# Altium PCB PCB2.PcbDoc (part 1 of 2)
Units mil, origin at the board's own origin, x right, y up, seen from the top; angles counter-clockwise.
Board outline 3622.05 x 2165.35 mil, 4 copper layers (Top Layer, GND, Sign, Bottom Layer), stack 41.556 mil thick; 150 components, 101 nets, 567 pads, 606 vias.
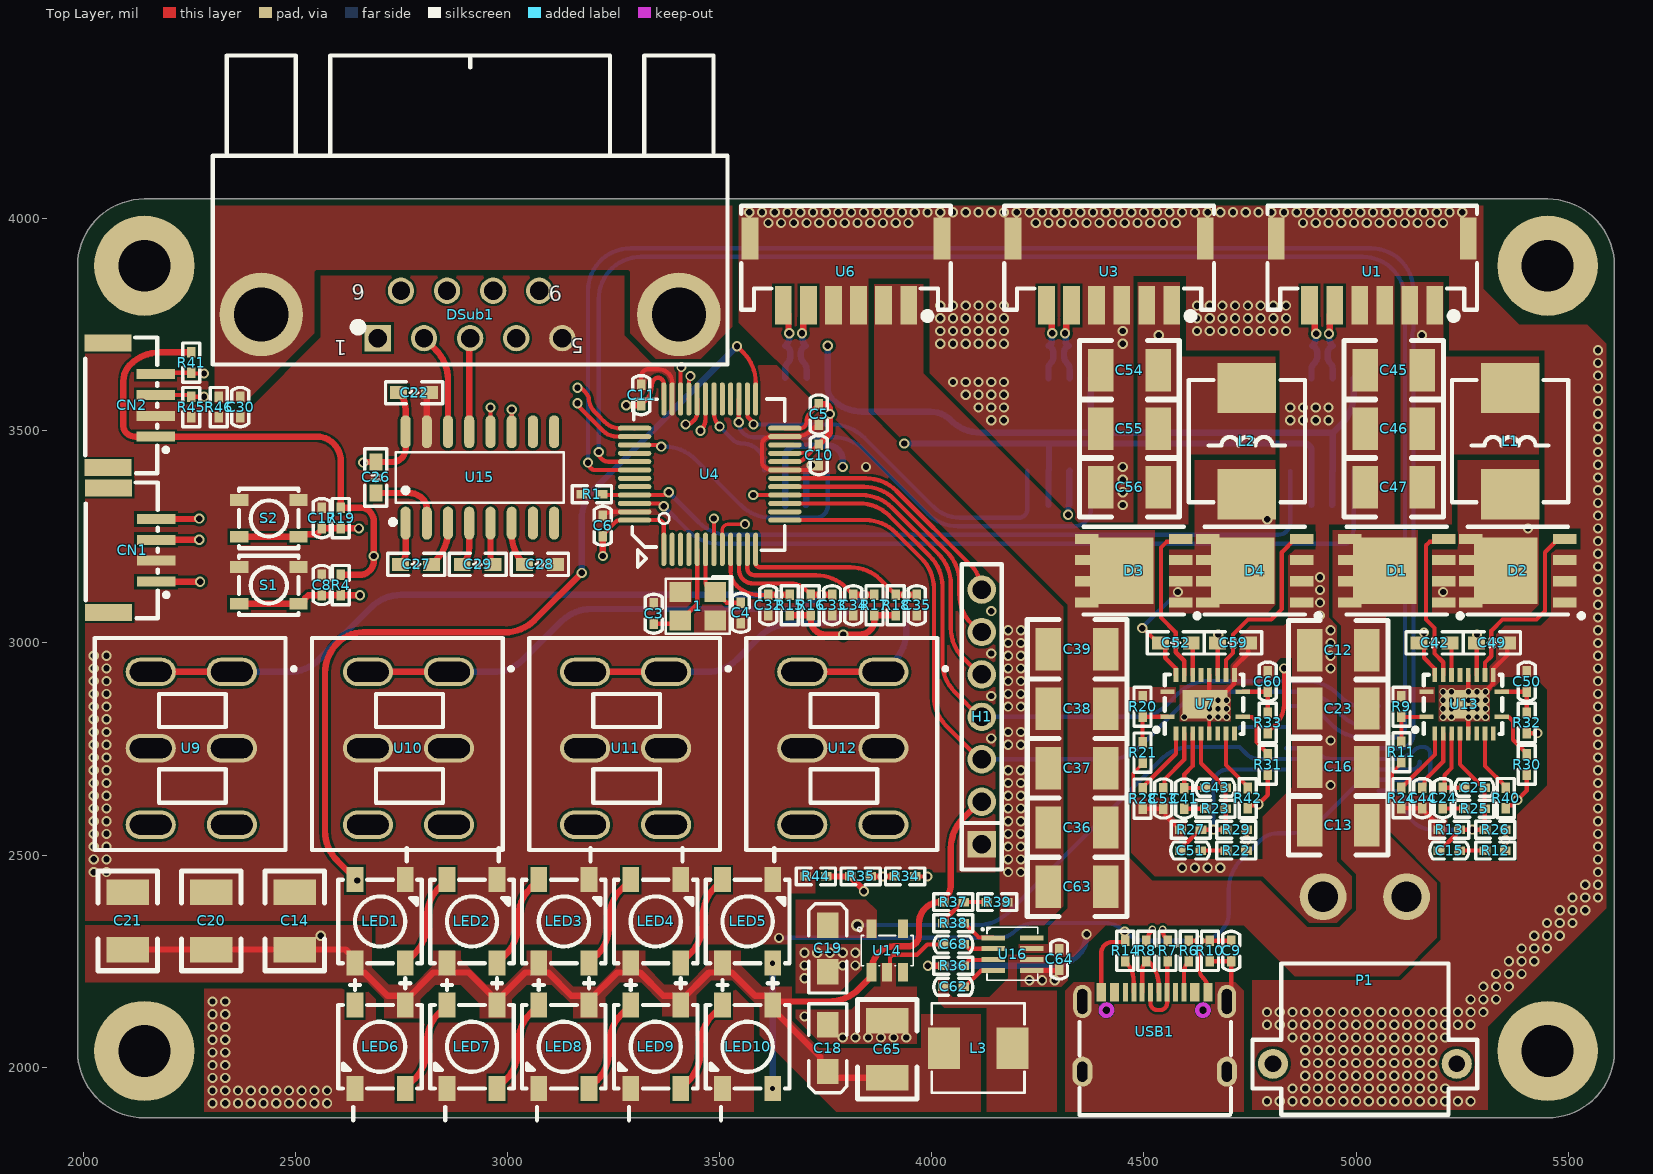
[diagram p0: Top Layer view]
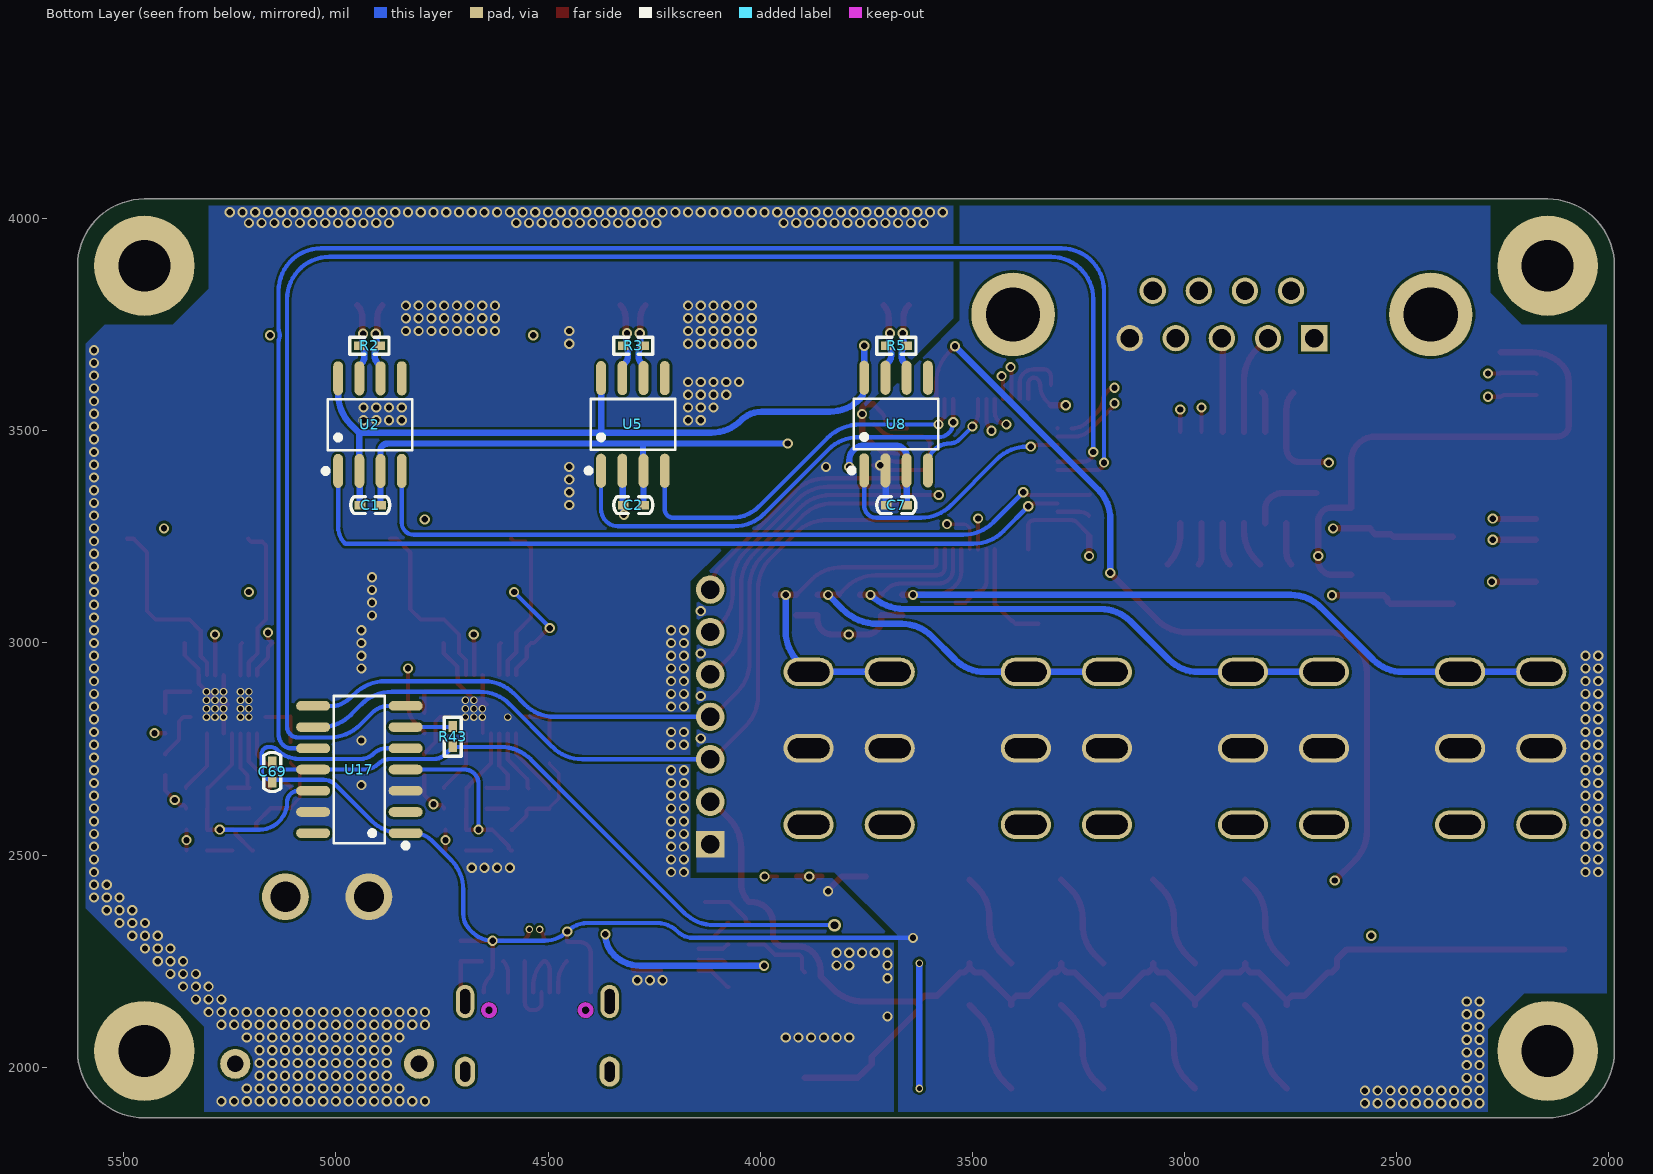
[diagram p1: Bottom Layer view, seen from below]
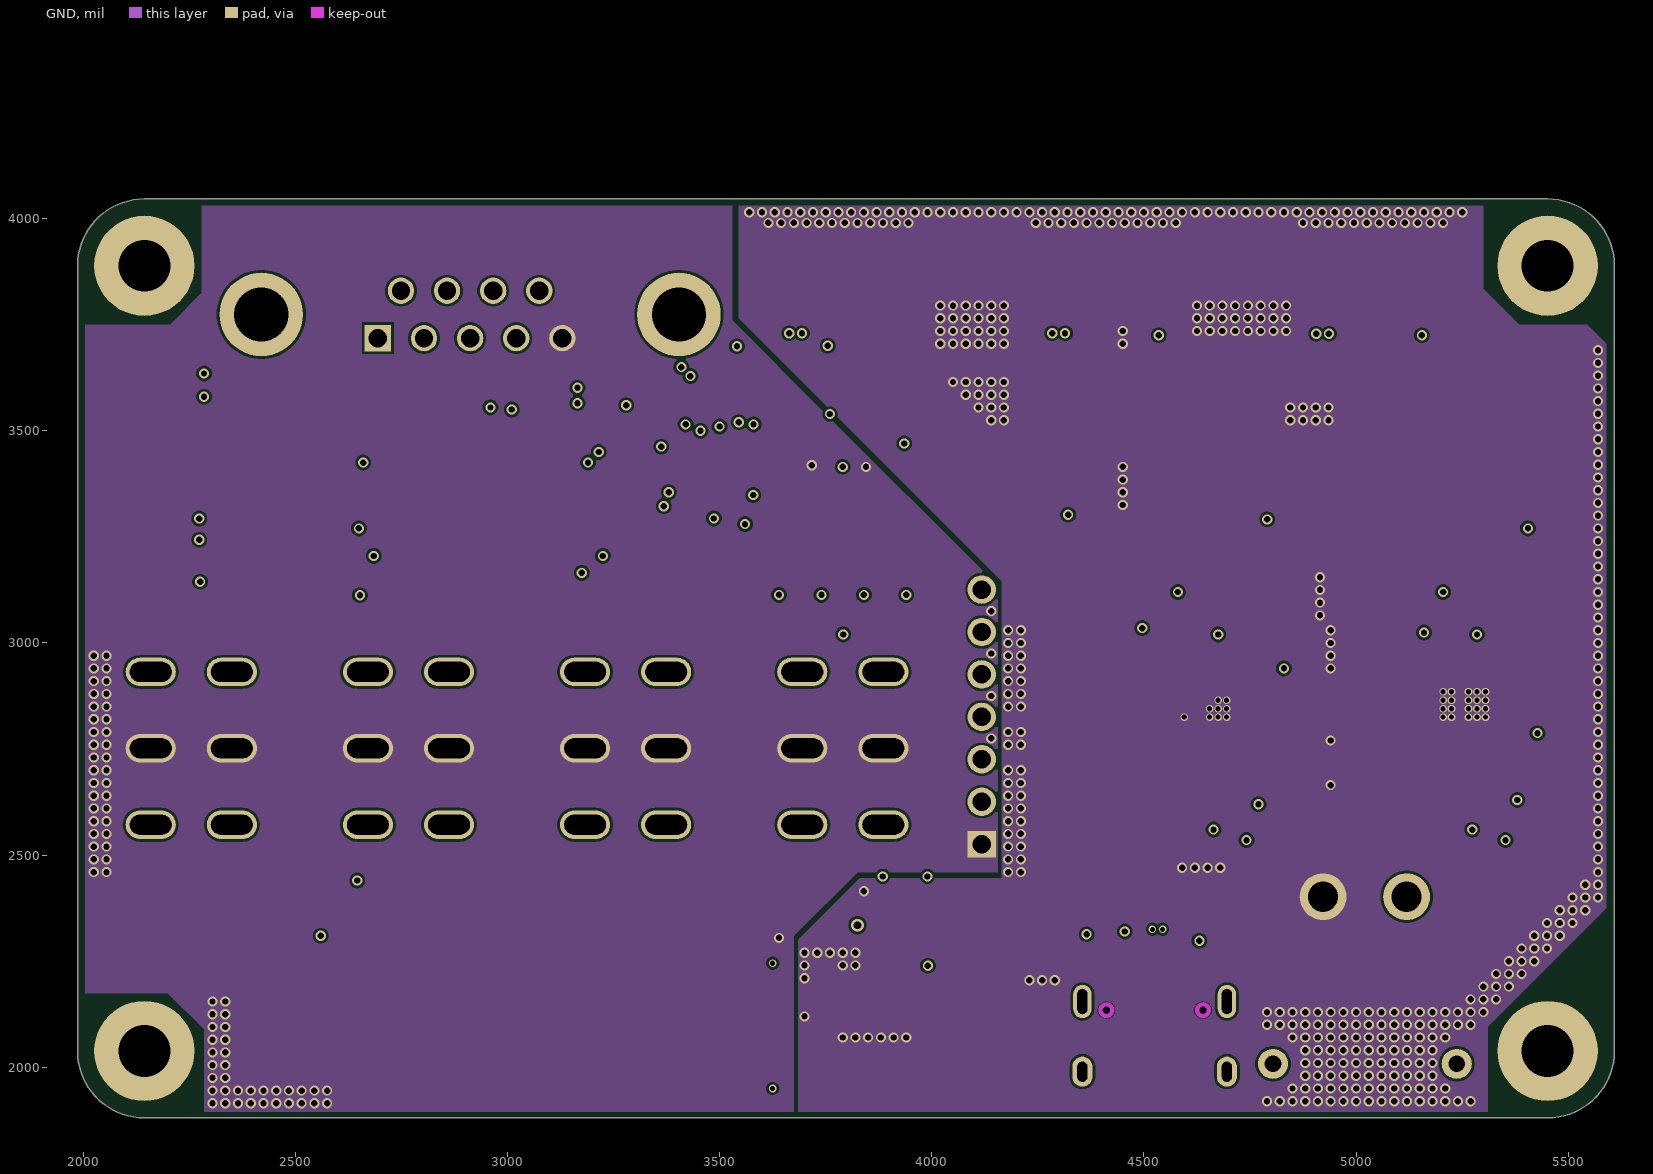
[diagram p2: GND]
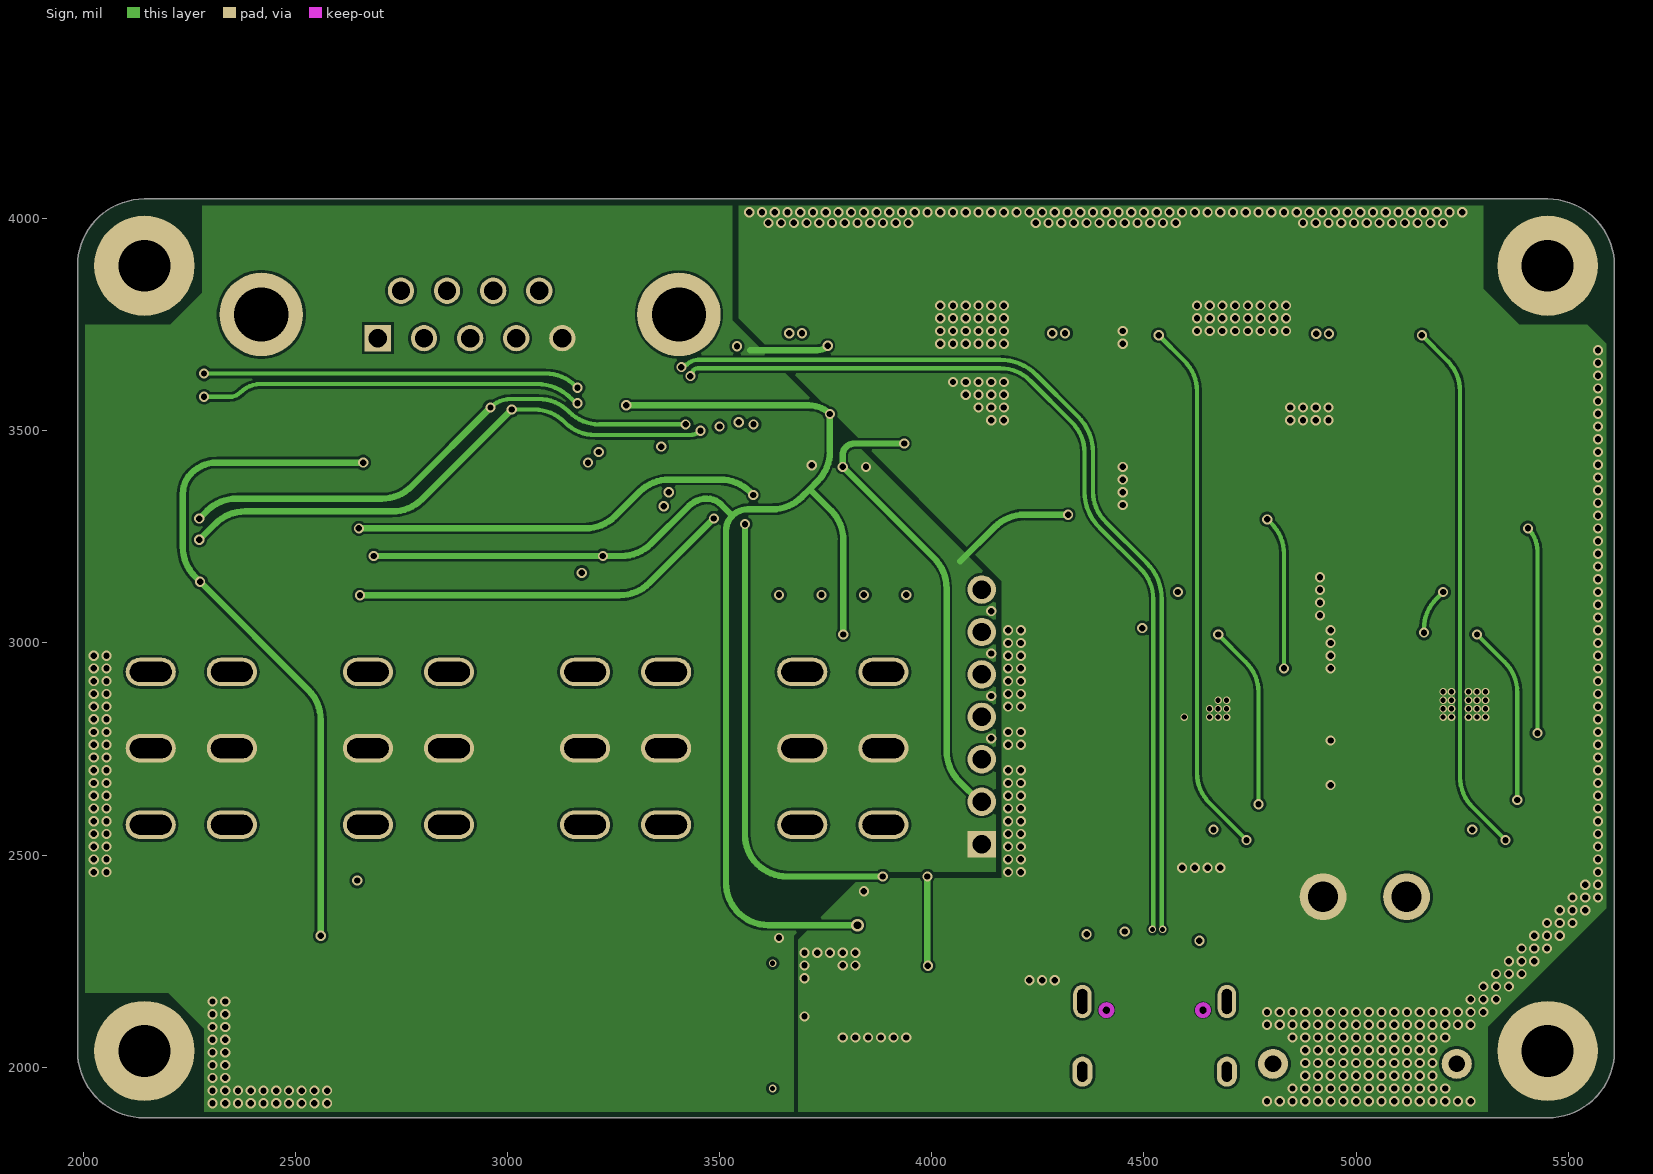
[diagram p3: Sign]
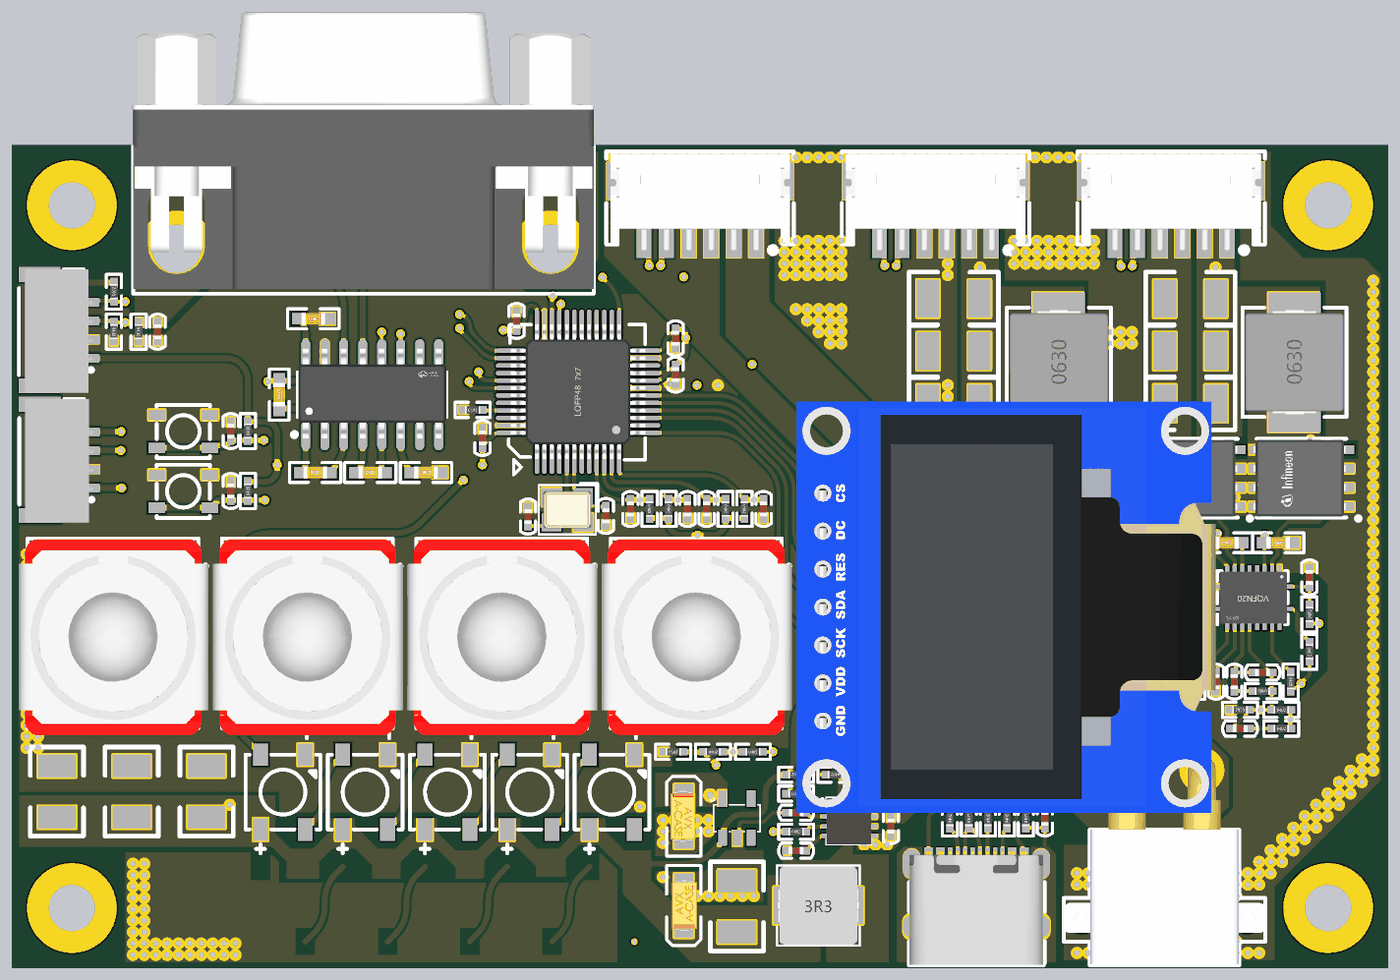
[diagram p5: 3D render of the assembled board from above, using the file's embedded part models]
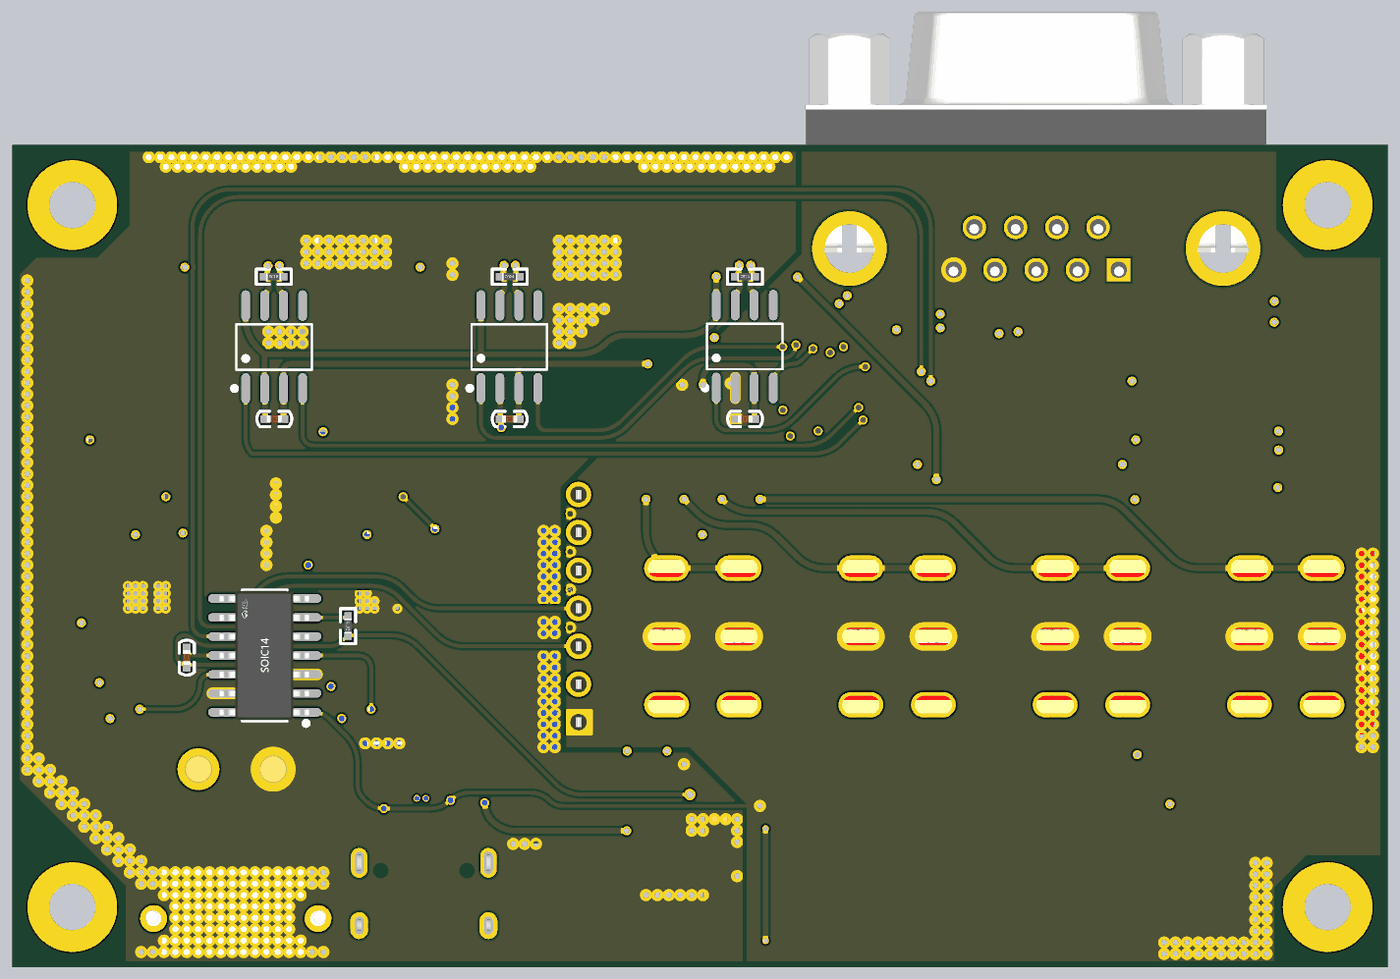
[diagram p6: 3D render of the assembled board from below, using the file's embedded part models]

## Layer stack, top to bottom
Top Solder: solder mask 0.4, Solder Resist, Dk 3.5
Top Layer: signal copper 1.4
Dielectric 2: prepreg 12, PP-006, Dk 4.1
GND: signal copper 1.378
Dielectric 1: dielectric 12, FR-4, Dk 4.8
Sign: signal copper 1.378
Dielectric 3: prepreg 12, PP-006, Dk 4.1
Bottom Layer: signal copper 1.4
Bottom Solder: solder mask 0.4, Solder Resist, Dk 3.5

## Board outline
5451.42,1880.91 2144.33,1880.91 cw(c2144.33,2038.39) 1986.85,2038.39 1986.85,3888.78 cw(c2144.33,3888.78) 2144.33,4046.26 5451.42,4046.26 cw(c5451.42,3888.78) 5608.9,3888.78 5608.9,2038.39 cw(c5451.42,2038.39)

## Design rules (kind name [scope] priority, off if disabled: settings)
AssemblyTestpoint AssemblyTestpoint_1 [All] p2: testpointundercomponent=TRUE minsize=40 maxsize=100 preferedsize=60 minholesize=0 maxholesize=40 preferedholesize=32 testpointgrid=1 usegrid=TRUE gridtolerance=0.01 allowsidetop=TRUE allowsidebottom=TRUE
Clearance [All] p1: gap=6 ignorepadtopadclearanceinfootprint=FALSE
DiffPairsRouting [All] p1: maxlimit=10 minlimit=8 mostfreqgap=10 toplayer_minwidth=10 toplayer_maxwidth=15 toplayer_prefwidth=15 midlayer1_minwidth=10 midlayer1_maxwidth=15 midlayer1_prefwidth=15 midlayer2_minwidth=10 midlayer2_maxwidth=15 midlayer2_prefwidth=15 bottomlayer_minwidth=10 bottomlayer_maxwidth=15 bottomlayer_prefwidth=15 maxuncoupledlength=500
Height [All] p1: minheight=0 maxheight=5000 prefheight=500
HoleSize [All] p1: absolutevalues=TRUE maxlimit=400 minlimit=1 maxpercent=80.000 minpercent=20.000
HoleToHoleClearance [All] p1: gap=5 allowstackedmicrovias=TRUE
MinimumSolderMaskSliver [All] p1: minsoldermaskwidth=0
NetAntennae [InNet('No Net')] p1: netantennaetolerance=0
PlaneConnect [All] p1: planeconnectstyle=Direct reliefexpansion=20 reliefentries=4 reliefconductorwidth=10 reliefairgap=10
PolygonConnect [All] p1: connectstyle=Direct reliefconductorwidth=10 reliefentries=4 polygonreliefangle="90 Angle" airgapwidth=10
RoutingVias [All] p1: holewidth=15 width=24 viastyle="Through Hole" minholewidth=12 minwidth=18 maxholewidth=30 maxwidth=50
SilkToSilkClearance [All] p1: silktosilkclearance=0
SilkToSolderMaskClearance [IsPad] p1: minsilkscreentomaskgap=0 clearancetoexposedcopper=TRUE
SolderMaskExpansion [All] p1: expansion=4 istentingtop=FALSE
UnRoutedNet [All] p1: checkbadconnections=TRUE
Width [All] p1: maxlimit=15 minlimit=8 preferedwidth=10
20 further rules are at their usual default settings.

## Classes and differential pairs
component class Power: C12 C13 C15 C16 C18 C19 C22 C23 C24 C25 C26 C27 C28 C29 C30 C36 C37 C38 C39 C41 C42 C43 C44 C45 C46 C47 C49 C50 C51 C52 C53 C54 C55 C56 C59 C60 C62 C63 C64 C65 C68 C69 D1 D2 D3 D4 DSub1 L1 L2 L3 P1 R9 R11 R12 R13 R20 R21 R22 R23 R24 R25 R26 R27 R28 R29 R30 R31 R32 R33 R36 R37 R38 R39 R40 R42 R43 R44 R46 U7 U13 U14 U15 U16 U17
component class Main: 1 C1 C2 C3 C4 C5 C6 C7 C8 C9 C10 C11 C14 C17 C20 C21 C32 C33 C34 C35 CN1 CN2 H1 LED1 LED2 LED3 LED4 LED5 LED6 LED7 LED8 LED9 LED10 R1 R2 R3 R4 R5 R6 R7 R8 R10 R14 R15 R16 R17 R18 R19 R34 R35 R41 R45 S1 S2 U1 U2 U3 U4 U5 U6 U8 U9 U10 U11 U12 USB1
differential pair USB: +USB_P -USB_N
differential pair FDCAN3: +FDCAN3_P -FDCAN3_N
differential pair FDCAN2: +FDCAN2_P -FDCAN2_N
differential pair FDCAN1: +FDCAN1_P -FDCAN1_N

## Components (designator, comment, footprint, x,y, rotation, side; value= is the part's Value field where it differs from the comment)
1 "3225贴片晶振" OSC-3225-4P 3448.46,3086.85 r180 top value=16M
C1 "100nF" c0402 4895,3325 r0 bottom
C2 "100nF" c0402 4275,3325 r0 bottom
C3 "15pF" c0402 3345,3093.2 r270 top
C4 "15pF" c0402 3550,3046.8 r90 top
C5 "100nF" c0402 3733.46,3514.35 r90 top
C6 "100nF" c0402 3225,3300 r270 top
C7 "100nF" c0402 3655,3325 r0 bottom
C8 "100nF" c0402 2562.56,3160.59 r270 top
C9 "100nF" c0402 4705.63,2250 r90 top
C10 "100nF" c0402 3733.46,3418.65 r90 top
C11 "100nF" c0402 3315,3560 r90 top
C12 "10uF" 1210 4890.39,2983.27 r0 top
C13 "10uF" 1210 4890.39,2569.88 r0 top
C14 "10uF" 1210 2498.66,2412.4 r270 top
C15 "820pF" c0402 5243.71,2510.83 r180 top
C16 "10uF" 1210 4890.39,2707.68 r0 top
C17 "100nF" c0402 2562.56,3318.39 r270 top
C18 "10uF" 3216 3755,1990 r270 top
C19 "10uF" 3216 3755,2335 r90 top
C20 "10uF" 1210 2301.81,2412.4 r270 top
C21 "10uF" 1210 2104.96,2412.4 r270 top
C22 "1uF" "C 0603_M" 2780,3590 r180 top
C23 "10uF" 1210 4890.39,2845.47 r0 top
C24 "5.6nF" c0402 5204.34,2658.46 r270 top
C25 "82pF" c0402 5302.77,2658.46 r180 top
C26 "1uF" "C 0603_M" 2690,3390 r90 top
C27 "1uF" "C 0603_M" 2785,3185 r0 top
C28 "1uF" "C 0603_M" 3076.5,3185 r0 top
C29 "1uF" "C 0603_M" 2930,3185 r0 top
C30 "100nF" c0402 2370,3580 r270 top
C32 "100nF" c0402 3615,3065 r90 top
C33 "100nF" c0402 3765,3065 r90 top
C34 "100nF" c0402 3815,3065 r90 top
C35 "100nF" c0402 3965,3065 r90 top
C36 "10uF" 1210 4275,2565 r0 top
C37 "10uF" 1210 4275,2705 r0 top
C38 "10uF" 1210 4275,2845 r0 top
C39 "10uF" 1210 4275,2985 r0 top
C41 "5.6nF" c0402 4595.12,2657.45 r270 top
C42 "100nF" "C 0603_M" 5185,3000 r0 top
C43 "82pF" c0402 4692.53,2658.46 r180 top
C44 "47nF" c0402 5156.14,2658.46 r270 top
C45 "22uF" 1210 5021.14,3642.72 r0 top
C46 "22uF" 1210 5021.14,3504.92 r0 top
C47 "22uF" 1210 5021.14,3367.13 r0 top
C49 "2.2uF" "C 0603_M" 5320,3000 r180 top
C50 "12pF" c0402 5402.2,2933.04 r270 top
C51 "820pF" c0402 4633.48,2510.83 r180 top
C52 "100nF" "C 0603_M" 4575,3000 r0 top
C53 "47nF" c0402 4545.91,2657.45 r270 top
C54 "22uF" 1210 4398.27,3642.72 r0 top
C55 "22uF" 1210 4398.27,3504.92 r0 top
C56 "22uF" 1210 4398.27,3367.13 r0 top
C59 "2.2uF" "C 0603_M" 4710,3000 r180 top
C60 "12pF" c0402 4791.97,2933.04 r270 top
C62 "100nF" c0402 4075,2189.37 r180 top
C63 "10uF" 1210 4275,2425 r0 top
C64 "100nF" c0402 4300,2230 r90 top
C65 "10uF" 1210 3895,2110 r270 top
C68 "100nF" c0402 4026.8,2289.37 r0 top
C69 "100nF" c0402 5150,2671.8 r90 bottom
CN1 "卧式UART" CONN-SMD_4P-P1.25_GH1.25-4P 2116.1,3218.35 r270 top
CN2 "卧式STLINK" CONN-SMD_4P-P1.25_GH1.25-4P 2115,3560 r270 top
D1 "CSD18540" pg-tdson-8 4986.62,3120.28 r90 top
D2 "CSD18540" pg-tdson-8 5272.05,3120.28 r90 top
D3 "CSD18540" pg-tdson-8 4366.54,3120.28 r90 top
D4 "CSD18540" pg-tdson-8 4651.97,3120.28 r90 top
DSub1 "DMR-9S" DSUB-TH_DMR-9S 2912.01,4022.68 r90 top
H1 "PM254V-11-07-H85" HDR-TH_7P-P2.54-V-F 4117.83,2825.79 r90 top
L1 "5.6uH" L-SMD-0630 5362.83,3475.39 r90 top
L2 "5.6uH" L-SMD-0630 4742.76,3475.39 r90 top
L3 "22uH" IND-SMD_L5.4-W5.2 4109.29,2045 r0 top value=10uH
LED1 "XL-5050RGBC-WS2812B" LED-SMD_4P-L5.0-W5.0-BL_XL-5050RGBC 1980.55,2927.24 r0 top
LED2 "XL-5050RGBC-WS2812B" LED-SMD_4P-L5.0-W5.0-BL_XL-5050RGBC 2197.09,2927.24 r0 top
LED3 "XL-5050RGBC-WS2812B" LED-SMD_4P-L5.0-W5.0-BL_XL-5050RGBC 2413.62,2927.24 r0 top
LED4 "XL-5050RGBC-WS2812B" LED-SMD_4P-L5.0-W5.0-BL_XL-5050RGBC 2630.15,2927.24 r0 top
LED5 "XL-5050RGBC-WS2812B" LED-SMD_4P-L5.0-W5.0-BL_XL-5050RGBC 2846.7,2927.24 r0 top
LED6 "XL-5050RGBC-WS2812B" LED-SMD_4P-L5.0-W5.0-BL_XL-5050RGBC 3419.22,1464.8 r180 top
LED7 "XL-5050RGBC-WS2812B" LED-SMD_4P-L5.0-W5.0-BL_XL-5050RGBC 3635.75,1464.8 r180 top
LED8 "XL-5050RGBC-WS2812B" LED-SMD_4P-L5.0-W5.0-BL_XL-5050RGBC 3852.28,1464.8 r180 top
LED9 "XL-5050RGBC-WS2812B" LED-SMD_4P-L5.0-W5.0-BL_XL-5050RGBC 4068.82,1464.8 r180 top
LED10 "XL-5050RGBC-WS2812B" LED-SMD_4P-L5.0-W5.0-BL_XL-5050RGBC 4285.36,1464.8 r180 top
P1 "XT30PW-M" XT30PW-M 5020.63,2205 r0 top
R1 "10KΩ" R0402 3175,3350 r0 top
R2 "120Ω" R0402 4896.8,3700 r0 bottom
R3 "120Ω" R0402 4275,3700 r0 bottom
R4 "10KΩ" R0402 2607.56,3112.39 r90 top
R5 "120Ω" R0402 3655,3700 r0 bottom
R6 "5.1KΩ" R0402 4605.63,2250 r90 top
R7 "22Ω" R0402 4555.63,2250 r90 top
R8 "22Ω" R0402 4505.63,2250 r90 top
R9 "80.6KΩ" R0402 5106.93,2873.99 r270 top
R10 "10KΩ" R0402 4655.63,2250 r90 top
R11 "7.5KΩ" R0402 5106.93,2718.53 r90 top
R12 "100Ω" R0402 5303.78,2510.83 r0 top
R13 "0Ω" R0402 5243.71,2560.04 r180 top
R14 "5.1KΩ" R0402 4455.63,2250 r90 top
R15 "10KΩ" R0402 3665,3113.2 r270 top
R16 "10KΩ" R0402 3715,3113.2 r270 top
R17 "10KΩ" R0402 3865,3113.2 r270 top
R18 "10KΩ" R0402 3915,3113.2 r270 top
R19 "10KΩ" R0402 2607.56,3270.19 r90 top
R20 "80.6KΩ" R0402 4496.69,2873.99 r270 top
R21 "7.5KΩ" R0402 4496.69,2717.52 r90 top
R22 "100Ω" R0402 4693.54,2510.83 r0 top
R23 "10KΩ" R0402 4692.53,2609.25 r180 top
R24 "23.7KΩ" R0402 5106.93,2658.46 r270 top
R25 "10KΩ" R0402 5302.77,2609.25 r180 top
R26 "10KΩ" R0402 5303.78,2560.04 r0 top
R27 "0Ω" R0402 4634.49,2560.04 r180 top
R28 "23.7KΩ" R0402 4496.69,2657.45 r270 top
R29 "10KΩ" R0402 4693.54,2560.04 r0 top
R30 "20KΩ" R0402 5402.2,2737.2 r270 top
R31 "20KΩ" R0402 4791.97,2737.2 r270 top
R32 "499Ω" R0402 5402.2,2787.43 r90 top
R33 "499Ω" R0402 4791.97,2787.43 r90 top
R34 "10KΩ" R0402 3913.02,2449.68 r0 top
R35 "1KΩ" R0402 3808.02,2449.68 r0 top
R36 "10KΩ" R0402 4026.8,2239.37 r0 top
R37 "43KΩ" R0402 4075,2389.37 r180 top
R38 "51KΩ" R0402 4075,2339.37 r180 top
R39 "8.2KΩ" R0402 4178.2,2389.37 r180 top
R40 "20KΩ" R0402 5352.99,2658.46 r270 top
R41 "10KΩ" R0402 2255,3636.8 r90 top
R42 "20KΩ" R0402 4745,2658.2 r270 top
R43 "10KΩ" R0402 4725,2803.2 r270 bottom
R44 "0Ω" R0402 3703.02,2449.68 r0 top
R45 "10KΩ" R0402 2255,3580 r270 top
R46 "10KΩ" R0402 2320,3580 r270 top
S1 "SW" KEY_SMD 2437.56,3135.59 r180 top
S2 "SW" KEY_SMD 2437.56,3293.39 r180 top
U1 "ZX-ZH1.5-6PWT" CONN-SMD_6P-P1.50_ZX-ZH1.5-6PWT 5038.04,3874.25 r180 top
U2 "SN65HVD1050DR" SOIC-8_L4.9-W3.9-P1.27-LS6.0-BL 4919.76,3514.45 r180 bottom
U3 "ZX-ZH1.5-6PWT" CONN-SMD_6P-P1.50_ZX-ZH1.5-6PWT 4417.95,3874.25 r180 top
U4 "STM32G474CET6" LQFP-48 2011.77,2292.72 r90 top
U5 "SN65HVD1050DR" SOIC-8_L4.9-W3.9-P1.27-LS6.0-BL 4300,3515 r180 bottom
U6 "ZX-ZH1.5-6PWT" CONN-SMD_6P-P1.50_ZX-ZH1.5-6PWT 3797.87,3874.25 r180 top
U7 "LM25145RGYR" VQFN-20_L4.5-W3.5-P0.50-BL-EP 4644.33,2855.4 r0 top
U8 "SN65HVD1050DR" SOIC-8_L4.9-W3.9-P1.27-LS6.0-BL 3680,3515.85 r180 bottom
U9 "7208P1YZQI" SW-TH_6P-L12.7-W11.4-P4.70-LS4.8 2262.44,2761.73 r180 top
U10 "7208P1YZQI" SW-TH_6P-L12.7-W11.4-P4.70-LS4.8 2774.25,2761.73 r180 top
U11 "7208P1YZQI" SW-TH_6P-L12.7-W11.4-P4.70-LS4.8 3286.06,2761.73 r180 top
U12 "7208P1YZQI" SW-TH_6P-L12.7-W11.4-P4.70-LS4.8 3797.87,2761.73 r180 top
U13 "LM25145RGYR" VQFN-20_L4.5-W3.5-P0.50-BL-EP 5254.57,2855.31 r0 top
U14 "XC6201P332MR-HXY" SOT-23-5_L3.0-W1.7-P0.95-LS2.8-BR 3895,2275 r270 top
U15 "MAX232ESE+T" SOIC-16_L9.9-W3.9-P1.27-LS6.0-BL 2930,3390 r0 top
U16 "MP9943" "QFN-8 3x3" 4145,2304.96 r0 top
U17 "AD8402ARZ10-REEL" SOIC-14_L8.7-W3.9-P1.27-LS6.0-BL 4944.66,2701.67 r90 bottom
USB1 "TYPE-C 16PIN 2MD(073)" USB-C-SMD_TYPE-C-6PIN-2MD-073 4525.35,2083.15 r0 top

## Footprints (in the part's own frame and the unit in brackets; to place one, negate y for a bottom-side part, rotate by r counter-clockwise, add the part's x,y. Pads: shape width x height; smd on the part's side, far side on the other; paste and mask are expansions set on the pad)
1210 [mil]
  rect 60x100 smd: 1(0,0) 2(135,0)
  silkscreen extent -50,-70 185,70, body extent 4,-49 130,49, height 30
3216 [mil]
  rect 60x50 smd: 1(0,0) 2(-110,0)
  silkscreen extent -160,-45 50,45, body extent -122,-31 12,35, height 67
c0402 [mil]
  rect 25x20 smd: 1(0,0) 2(48.2,0)
  silkscreen extent -22,-20 70,20, body extent 5,-10 44,10, height 20
"C 0603_M" [mil] "无极性贴片电容"
  rect 40x30 smd: 1(-36.5,0) 2(36.5,0)
  silkscreen extent -68,-26 68,26, body extent -31,-16 31,16, height 32
CONN-SMD_4P-P1.25_GH1.25-4P [mm]
  rect 0.6x2.3 smd mask+0.051: 1(1.875,1.425) 2(0.625,1.425) 3(-0.625,1.425) 4(-1.875,1.425)
  rect 1x2.8 smd mask+0.051: 5(-3.725,-1.425) 6(3.725,-1.425)
  silkscreen extent -4.06,-2.8 4.06,2.16, body extent -4.07,-2.4 4.19,2.15, height 4.13
CONN-SMD_6P-P1.50_ZX-ZH1.5-6PWT [mm]
  rect 1x2.3 smd paste+0 mask+0.05: 1(-3.75,2) 2(-2.25,2) 3(-0.75,2) 4(0.75,2) 5(2.25,2) 6(3.75,2)
  rect 1x2.5 smd paste+0 mask+0.05: 7(5.75,-2) 8(-5.75,-2)
  silkscreen extent -6.27,-3.97 6.27,3.04, body extent -6,-3.81 6.01,2.69, height 3.7
DSUB-TH_DMR-9S [mil]
  rect 62x62 hole 43.31 paste+0 mask+2: 1(-304.49,217.32)
  round 62 hole 43.31 paste+0 mask+2: 2(-304.49,108.66) 3(-304.49,0) 4(-304.49,-108.66) 5(-304.49,-217.32) 6(-192.68,162.99) 7(-192.68,54.33) 8(-192.68,-54.33) 9(-192.68,-162.99)
  round 196.85 hole 127.95 paste+0 mask+2: 10(-248.59,492.13) 11(-248.59,-492.12)
  silkscreen extent -367,-606 362,606, body extent -355,-608 374,608, height 498
HDR-TH_7P-P2.54-V-F [mm]
  rect 1.575x1.7 hole 1.1: 1(-7.62,0)
  round 1.7 hole 1.1: 2(-5.08,0) 3(-2.54,0) 4(0,0) 5(2.54,0) 6(5.08,0) 7(7.62,0)
  silkscreen extent -9.13,-1.2 9.13,1.2, body extent -13.63,-26.36 13.88,1.69, height 14.46
IND-SMD_L5.4-W5.2 [mm]
  rect 1.9x2.5 smd: 1(2.05,0) 2(-2.05,0)
  silkscreen extent -2.78,-2.68 2.78,2.68, body extent -2.7,-2.6 2.7,2.6, height 3.1
KEY_SMD [mm]
  rect 1.1x0.7 smd: 1(-1.775,-1.1) 1(1.775,-1.1) 2(-1.775,1.1) 2(1.775,1.1)
  silkscreen extent -1.78,-1.78 1.78,1.78, body extent -1.75,-1.35 1.75,1.35, height 1.6
L-SMD-0630 [mm] "一体化成型电感"
  rect 3x3.5 smd: 1(-3.175,0) 2(3.175,0)
  silkscreen extent -3.66,-3.48 3.66,3.48, body extent -3.47,-3.3 3.47,3.3, height 3.05
LED-SMD_4P-L5.0-W5.0-BL_XL-5050RGBC [mm]
  rect 1x1.5 smd: 1(16.771,-17.323) 2(19.771,-17.323) 3(19.771,-12.323) 4(16.771,-12.323)
  silkscreen extent 15.77,-18.92 20.77,-10.42, body extent 15.79,-17.56 20.79,-12.16, height 1.54
LQFP-48 [mm]
  oval 2x0.3 smd: 1(23.567,-34.461) 2(23.567,-34.961) 3(23.567,-35.461) 4(23.567,-35.961) 5(23.567,-36.461) 6(23.567,-36.961) 7(23.567,-37.461) 8(23.567,-37.961) 9(23.567,-38.461) 10(23.567,-38.961) 11(23.567,-39.461) 12(23.567,-39.961) 25(32.567,-39.961) 26(32.567,-39.461) 27(32.567,-38.961) 28(32.567,-38.461) 29(32.567,-37.961) 30(32.567,-37.461) 31(32.567,-36.961) 32(32.567,-36.461) 33(32.567,-35.961) 34(32.567,-35.461) 35(32.567,-34.961) 36(32.567,-34.461)
  oval 0.3x2 smd: 13(25.317,-41.711) 14(25.817,-41.711) 15(26.317,-41.711) 16(26.817,-41.711) 17(27.317,-41.711) 18(27.817,-41.711) 19(28.317,-41.711) 20(28.817,-41.711) 21(29.317,-41.711) 22(29.817,-41.711) 23(30.317,-41.711) 24(30.817,-41.711) 37(30.817,-32.711) 38(30.317,-32.711) 39(29.817,-32.711) 40(29.317,-32.711) 41(28.817,-32.711) 42(28.317,-32.711) 43(27.817,-32.711) 44(27.317,-32.711) 45(26.817,-32.711) 46(26.317,-32.711) 47(25.817,-32.711) 48(25.317,-32.711)
  silkscreen extent 22.51,-41.71 32.57,-32.57, body extent 23.56,-41.71 32.57,-32.71, height 1.45
OSC-3225-4P [mm] "3.2*2.5*0.7mm(长宽高)                             淘宝ID:黄晶宝石"
  rect 1.3x1.2 smd: 1(-1.05,-0.85) 2(1.05,-0.85) 3(1.05,0.85) 4(-1.05,0.85)
  silkscreen extent -2.03,-1.75 1.91,1.65, body extent -1.6,-1.25 1.6,1.25, height 0.7
pg-tdson-8 [mm]
  rect 0.61x1.4 smd: 1(3.175,-5.588) 2(-0.635,0.044) 2(0.635,0.044) 2(1.905,0.044) 2(3.175,0.044) 3(-0.635,-5.588) 3(0.635,-5.588) 3(1.905,-5.588)
  rect 4x3.81 smd: 2(1.27,-2.056)
  silkscreen extent -1.55,-6.7 3.9,0.23, body extent -1.43,-5.73 3.96,0.42, height 1.01
"QFN-8 3x3" [mm]
  rect 1.4x0.3 smd: 1(0,0) 2(0,-0.65) 3(0,-1.3) 4(0,-1.95) 5(2.3,-1.95) 6(2.3,-1.3) 7(2.3,-0.65) 8(2.3,0)
  silkscreen extent -0.64,-2.54 2.67,0.64, body extent -0.41,-2.53 2.69,0.57, height 0.94
R0402 [mil] "1/16W"
  rect 25x20 smd: 1(0,0) 2(48.2,0)
  silkscreen extent -22,-20 70,20, body extent 5,-10 44,10, height 14
SOIC-8_L4.9-W3.9-P1.27-LS6.0-BL [mm]
  oval 0.588x2.045 smd mask+0.051: 1(-1.905,-2.772) 2(-0.635,-2.772) 3(0.635,-2.772) 4(1.905,-2.772) 5(1.905,2.772) 6(0.635,2.772) 7(-0.635,2.772) 8(-1.905,2.772)
  silkscreen extent -2.8,-2.92 2.53,1.52, body extent -2.45,-3 2.45,3, height 1.75
SOIC-14_L8.7-W3.9-P1.27-LS6.0-BL [mil]
  oval 22.6x80.24 smd: 1(-150,-109.02) 2(-100,-109.02) 3(-50,-109.02) 4(0,-109.02) 5(50,-109.02) 6(100,-109.02) 7(150,-109.02) 8(150,109.02) 9(100,109.02) 10(50,109.02) 11(0,109.02) 12(-50,109.02) 13(-100,109.02) 14(-150,109.02)
  silkscreen extent -185,-115 173,60, body extent -169,-117 169,119, height 75
SOIC-16_L9.9-W3.9-P1.27-LS6.0-BL [mil]
  oval 23.7x77.6 smd paste+0 mask+2: 1(-169.99,-107.7) 2(-119.99,-107.7) 3(-69.99,-107.7) 4(-19.99,-107.7) 5(30.01,-107.7) 6(80.01,-107.7) 7(130.01,-107.7) 8(180.01,-107.7) 9(180.01,107.7) 10(130.01,107.7) 11(80.01,107.7) 12(30.01,107.7) 13(-19.99,107.7) 14(-69.99,107.7) 15(-119.99,107.7) 16(-169.99,107.7)
  silkscreen extent -206,-111 203,60, body extent -190,-115 200,121, height 75
SOT-23-5_L3.0-W1.7-P0.95-LS2.8-BR [mm]
  rect 1.1x0.6 smd: 1(1.3,-0.95) 2(1.3,0) 3(1.3,0.95) 4(-1.3,0.95) 5(-1.3,-0.95)
  silkscreen extent -1.4,-1.78 0.9,1.55, body extent -1.5,-1.5 1.5,1.5, height 1.3
SW-TH_6P-L12.7-W11.4-P4.70-LS4.8 [mm]
  oval 3x1.7 hole 1.2 slot 2.5 at 0 deg: 1(-2.235,-4.318) 2(-2.235,0.255) 3(-2.235,4.827) 4(2.616,-4.318) 5(2.618,0.255) 6(2.618,4.827)
  silkscreen extent -6.05,-6.35 5.96,6.35, body extent -6.15,-6.3 6.56,6.8, height 41.07
USB-C-SMD_TYPE-C-6PIN-2MD-073 [mm]
  rect 0.55x1.1 smd paste-100 mask+0.05: 1(-3.2,2.375) 2(-2.4,2.375) 11(2.4,2.375) 12(3.2,2.375)
  rect 0.3x1.1 smd paste-100 mask+0.05: 3(-1.75,2.375) 4(-1.25,2.375) 5(-0.75,2.375) 6(-0.25,2.375) 7(0.25,2.375) 8(0.75,2.375) 9(1.25,2.375) 10(1.75,2.375)
  oval 1.2x1.8 hole 0.6 slot 1.2 at 90 deg paste+0 mask+0.05: 13(-4.325,-2.375) 14(4.325,-2.375)
  oval 1.1x2 hole 0.6 slot 1.5 at 90 deg paste+0 mask+0.05: 13(-4.325,1.825) 14(4.325,1.825)
  Keep-Out Layer board cut-out: -2.54,1.305 -2.589,1.477 -2.717,1.603 -2.89,1.649 -3.063,1.603 -3.191,1.477 -3.24,1.305 -3.24,1.305 -3.191,1.133 -3.063,1.007 -2.89,0.961 -2.717,1.007 -2.589,1.133 -2.54,1.305
  Keep-Out Layer board cut-out: 3.24,1.305 3.191,1.477 3.063,1.603 2.89,1.649 2.717,1.603 2.589,1.477 2.54,1.305 2.54,1.305 2.589,1.133 2.717,1.007 2.89,0.961 3.063,1.007 3.191,1.133 3.24,1.305
  Keep-Out Layer circle w0.025: c-2.89,1.305 r0.35
  Keep-Out Layer circle w0.254: c-2.89,1.305 r0.35
  Keep-Out Layer circle w0.025: c2.89,1.305 r0.35
  Keep-Out Layer circle w0.254: c2.89,1.305 r0.35
  silkscreen extent -4.5,-4.97 4.57,0.6, body extent -4.47,-4.93 4.47,2.65, height 3.36
VQFN-20_L4.5-W3.5-P0.50-BL-EP [mm]
  rect 0.85x0.28 smd: 1(-2.25,-0.752) 10(2.25,-0.752) 11(2.25,0.748) 20(-2.25,0.75)
  rect 0.28x0.85 smd: 2(-1.749,-1.75) 3(-1.248,-1.75) 4(-0.749,-1.75) 5(-0.248,-1.75) 6(0.251,-1.75) 7(0.752,-1.75) 8(1.251,-1.75) 9(1.752,-1.75) 12(1.752,1.75) 13(1.251,1.75) 14(0.75,1.748) 15(0.25,1.748) 16(-0.25,1.748) 17(-0.75,1.748) 18(-1.25,1.748) 19(-1.75,1.748)
  rect 2.7x1.7 smd: 21(0,-0.002)
  silkscreen extent -3.05,-1.78 2.29,1.78, body extent -2.26,-1.76 2.26,1.76, height 1
XT30PW-M [mm]
  round 1.8 hole 1: 0(-5.5,-5) 0(5.5,-5)
  round 2.8 hole 1.8: +(2.5,5) -(-2.5,5)
  silkscreen extent -6.73,-8.05 6.73,1, body extent -6.65,-8 6.65,5.95, height 5.29

## Part data
C1 C2 C3 C4 C5 C6 C7 C8 C9 C10 C11 C15 C17 C24 C25 C30 C32 C33 C34 C35 C41 C42 C43 C44 C50 C51 C52 C53 C60 C62 C64 C68 C69: library part 0402贴片电容, "贴片电容0402"
C12 C13 C14 C16 C20 C21 C23 C36 C37 C38 C39 C45 C46 C47 C54 C55 C56 C63 C65: library part 1210贴片电容, "1210贴片电容"
C18 C19: library part 3216钽电容, "3216钽电容"
C22 C26 C27 C28 C29 C49 C59: library part 0603贴片电容, "0603贴片电容"
D1 D2 D3 D4: "N沟道MOS管", ComponentLink1Description="Manufacturer Link", ComponentLink1URL=http://www.irf.com/, DatasheetVersion=PD-9.814, LatestRevisionDate=17-Jul-2002, LatestRevisionNote="Re-released for DXP Platform.", Note="Pin 2 is electrically connected to pin 4.", PackageDescription="TO, Thru-Hole, Vertical, Heatsink Mounted; 3 In-Line Leads; Pitch 2.54 mm", PackageReference=TO-220AB, PackageVersion=Feb-1997, Published=8-Jun-2000, Publisher="Altium Limited"
H1: Current Rating (Max)=3A, JLCPCB Part Class="Extended Part", LCSC Part Name="间距:2.54mm 1x7P 直插", Manufacturer=XFCN(兴飞), Operating Temperature Range=-40℃~+105℃, Voltage Rating (Max)=250V, Add into BOM=yes, Circular Hole / Square Hole=方孔, Convert to PCB=yes, Datasheet=https://atta.szlcsc.com/upload/public/pdf/source/20210514/C2832270_F424CC0071A81298BFB56B53406F9842.pdf, Device=PM254V-11-07-H85, Holes Direction=顶部, Holes Structure=1x7P, Insulation Height=-, Manufacturer Part=PM254V-11-07-H85, Mounting Type=直插, Number of Holes=7P, Number of Rows=单排, Pitch=2.54mm, Row Spacing=-, Supplier=LCSC, Supplier Footprint=插件,P=2.54mm, Supplier Part=C2832270, Symbol=PM254V-11-07-H85
L1 L2: library part 0630功率电感, "一体成型屏蔽电感"
L3: library part 0530屏蔽电感, "一体成型屏蔽电感，0530封装，额定电流3A", DC Resistance (DCR)=125mΩ, JLCPCB Part Class="Extended Part", LCSC Part Name="10uH ±20% 3.5A", Manufacturer=XR(祥如), Manufacturer Part=XR0530-100M, Rated Current=3.2A, Saturation Current (Isat)=3.5A, Tolerance=±20%, Add into BOM=yes, Convert to PCB=yes, Datasheet=https://atta.szlcsc.com/upload/public/pdf/source/20240328/42FE63A3232C4AF7EB8F1CDEDD5FC69F.pdf, Device=XR0530-100M, Supplier=LCSC, Supplier Footprint=SMD,0530, Supplier Part=C5307602, Symbol=XR0530-100M, Type=一体成型电感
LED1 LED2 LED3 LED4 LED5 LED6 LED7 LED8 LED9 LED10: library part WS2812B彩灯珠, "WS2812B彩灯珠", Color Temperature=-, Emitted Color=RGB三色, JLCPCB Part Class="Extended Part", Lens Color=无色透明透镜, Manufacturer=XINGLIGHT(成兴光), Operating Temperature=-20℃~+85℃, Add into BOM=yes, Convert to PCB=yes, Datasheet=https://atta.szlcsc.com/upload/public/pdf/source/20230111/86AAD2096485A2E5BCAB883FF8CBE6FD.pdf, Device=XL-5050RGBC-WS2812B, Diode Configuration=-, Dominant Wavelength=-, Forward Current=-, LCSC Part Name=XL-5050RGBC-WS2812B, Manufacturer Part=XL-5050RGBC-WS2812B, Mounting Sytle=正贴, Peak Wavelength=625nm；470nm；530nm, Power Dissipation=-, Supplier=LCSC, Supplier Footprint=SMD5050, Supplier Part=C2843785, Symbol=XL-5050RGBC-WS2812B, Viewing Angle=120°
P1: library part 卧式XT30母头, "卧式XT30母头", LatestRevisionDate=17-Jul-2002, LatestRevisionNote="Re-released for DXP Platform.", Publisher="Altium Limited"
R1 R2 R3 R4 R5 R6 R7 R8 R9 R10 R11 R12 R13 R14 R15 R16 R17 R18 R19 R20 R21 R22 R23 R24 R25 R26 R27 R28 R29 R30 R31 R32 R33 R34 R35 R36 R37 R38 R39 R40 R41 R42 R43 R44 R45 R46: library part 0402贴片电阻, "0402贴片电阻"
S1 S2: "开关"
U1 U3 U6: Color=米色, Flame Retardant Rating=-, JLCPCB Part Class="Extended Part", LCSC Part Name="1x6P 间距:1.5mm 卧贴 系列:ZH", Manufacturer=Megastar(兆星), Operating Temperature=-25℃~+85℃, Rated Current=1A, Rated Voltage (Max)=250V, Add into BOM=yes, Contact Material=黄铜, Contact Plating=锡, Convert to PCB=yes, Datasheet=https://atta.szlcsc.com/upload/public/pdf/source/20231201/C5A824B953C40A6060EBF5A541254C86.pdf, Device=ZX-ZH1.5-6PWT, Manufacturer Part=ZX-ZH1.5-6PWT, Mounting Type=卧贴, Number of Pins=6P, Number of PINs Per Row=6, Number of Rows=1, Pins Structure=1x6P, Pitch=1.5mm, Plastic Material=LCP, Reference Series=ZH, Row Spacing=-, Supplementary Features=辅助焊脚, Supplier=LCSC, Supplier Footprint=SMD,P=1.5mm,卧贴, Supplier Part=C19272409, Symbol=ZX-ZH1.5-6PWT, X-Length of Bottom Edge on Board (Spacing Line)=12mm, Y-Width of Bottom Edge on Board=6.5mm, Z-Height of the Board=3.8mm
U2 U5 U8: "CAN芯片", JLCPCB Part Class="Extended Part", LCSC Part Name=4.5V~5.5V, Manufacturer=TI(德州仪器), Operating Temperature=-40℃~+125℃, Supply Current=50mA, Add into BOM=yes, Convert to PCB=yes, Datasheet=https://www.ti.com/cn/lit/gpn/sn65hvd1050, Device=SN65HVD1050DR, Manufacturer Part=SN65HVD1050DR, Name=SN65HVD1050DR, Supplier=LCSC, Supplier Footprint=SOIC-8, Supplier Part=C14019, Supply Voltage=4.5V~5.5V, Symbol=SN65HVD1050DR, Type=收发器
U4: JLCPCB Part Class="Extended Part", LCSC Part Name=STM32G473CBT6, Manufacturer=ST(意法半导体), Add into BOM=yes, Convert to PCB=yes, Datasheet=https://atta.szlcsc.com/upload/public/pdf/source/20200902/C730111_19331807E2800E1C1C13BFFAAC550E20.pdf, Device=STM32G473CBT6, Manufacturer Part=STM32G473CBT6, Supplier=LCSC, Supplier Footprint=LQFP-48(7x7), Supplier Part=C730111, Symbol=STM32G473CBT6
U7 U13: Input Voltage=6V~42V, JLCPCB Part Class="Extended Part", LCSC Part Name=LM251456V至42V同步降压直流/直流控制器, Manufacturer=TI(德州仪器), Operating Temperature=-40℃~+125℃, Output Current=20A, Output Voltage=800mV~40V, Quiescent Current (Iq)=-, Switching Frequency=100kHz~1MHz, Add into BOM=yes, Convert to PCB=yes, Datasheet=https://www.ti.com/cn/lit/gpn/lm25145, Device=LM25145RGYR, Function=降压型, Manufacturer Part=LM25145RGYR, Number of Outputs=1, Output Type=可调, Supplier=LCSC, Supplier Footprint=VQFN-20-EP(3.5x4.5), Supplier Part=C2876740, Switch tube (built-in/external)=外置, Symbol=LM25145RGYR, Synchronous Rectification=是, Topology=降压式
U9 U10 U11 U12: JLCPCB Part Class="Extended Part", LCSC Part Name="7208P1YZQI 五件套", Manufacturer=C&K, Operating Temperature=-30℃~+85℃, Voltage Rating (AC)=120V, Voltage Rating (DC)=28V, Actuator Type=圆柱钮柄, Add into BOM=yes, Circuit=双刀双掷, Convert to PCB=yes, Datasheet=https://atta.szlcsc.com/upload/public/pdf/source/20211221/AC201C7675510E1A13CA92FD8B8259B6.pdf, Device=7208P1YZQI, Manufacturer Part=7208P1YZQI, Mounting Style=直插, Pin Style=焊片, Supplier=LCSC, Supplier Footprint=插件, Supplier Part=C2824481, Symbol=7208P1YZQI
U14: "3.3V LDO", JLCPCB Part Class="Extended Part", Manufacturer="HXY MOSFET(华轩阳电子)", MAX Output Current=300mA, Maximum Input Voltage=12V, Output Voltage=3.3V, Add into BOM=yes, Convert to PCB=yes, Datasheet=https://atta.szlcsc.com/upload/public/pdf/source/20231208/3D7EFECB06481ED5AED4680614D7FFF5.pdf, Device=XC6201P332MR-HXY, LCSC Part Name=XC6201P332MR-HXY, Manufacturer Part=XC6201P332MR-HXY, Output Polarity=正极, Output Type=固定, Supplier=LCSC, Supplier Footprint=SOT-23-5L, Supplier Part=C19626990, Symbol=XC6201P332MR-HXY
U17: JLCPCB Part Class="Extended Part", LCSC Part Name=1-/2-/4-通道数字电位器, Manufacturer=ADI(亚德诺), Operating Temperature=-40℃~+125℃, Resistance Value (Ohms)=10kΩ, Supply Voltage=2.7V~5.5V, Temperature Coefficient (Typ)=500ppm/℃, Add into BOM=yes, Convert to PCB=yes, Datasheet=https://atta.szlcsc.com/upload/public/pdf/source/20211026/F04B6EDA79C62679C80111A8307D6AD8.pdf, Device=AD8402ARZ10-REEL, Interface Type=SPI, Manufacturer Part=AD8402ARZ10-REEL, Number of Channels=2, Number of Taps=256, Precision=±20%, Supplier=LCSC, Supplier Footprint=SOIC-14, Supplier Part=C578716, Symbol=AD8402ARZ10-REEL
USB1: Core Colour=黑色, Current Rating - Power (Max)=5A, JLCPCB Part Class="Extended Part", LCSC Part Name="Type-C 母 卧贴", Manufacturer="SHOU HAN(首韩)", Operating Temperature Range=-25℃~+85℃, Rated Voltage (Max)=5V, Add into BOM=yes, Connect-Disconnect Life=5千次, Connector Type=Type-C, Convert to PCB=yes, Datasheet=https://atta.szlcsc.com/upload/public/pdf/source/20211123/39B17C16241EAC15C5E277BDA434118E.pdf, Device="TYPE-C 16PIN 2MD(073)", Gender=母, Manufacturer Part="TYPE-C 16PIN 2MD(073)", Mounting Style=卧贴, Number of Contacts=16P, Number of Ports=1, Standard="USB 3.1", Supplier=LCSC, Supplier Footprint=SMD, Supplier Part=C2765186, Symbol="TYPE-C 16PIN 2MD(073)"

## Free pads (board coordinates)
  round 236.22 hole 122.05: 2(2144.33,2038.39) 2(2144.33,3888.78) 2(5451.42,2038.39) 2(5451.42,3888.78)

## Via types
v1: diameter 24, hole 15, Top Layer to Bottom Layer, 572 vias
v2: diameter 18, hole 12, Top Layer to Bottom Layer, 33 vias
v3: diameter 30, hole 18, Top Layer to Bottom Layer, 1 vias

## Nets (pads, with @x,y where several pads share a name; then routed paths per layer and width w, separated by ;. In a path a pad name is that pad's centre, name@x,y a point inside that pad or via, vN(x,y) a via of type N, cw(c..) or ccw(c..) an arc to the next point about the centre after c; other vN are vias at no path point)
3V3: C5.2 C6.2 C10.2 C11.1 C19.1 C69.2 CN2.1 R4.2 R15.2 R16.2 R17.2 R18.2 R19.2 R41.2 R43.2 U4.1 U4.20 U4.21 U4.24 U4.36 U4.48 U14.5 U17.11 | length 7329.5
  Top Layer w10: C6.2@3225,3251.8 cw(c3232.73,3251.8) 3227.26,3257.26 3255,3285 cw(c3265.74,3274.26) 3265.74,3289.45 U4.48@3299.61,3289.45 3354.26,3289.45 cw(c3354.26,3274.26) 3365,3285 cw(c3356.54,3276.54) 3368.5,3276.54 U4.1@3368.5,3220.55 ; C11.1@3315,3560 3325.25,3570.25 ccw(c3289.64,3605.86) 3340,3605.86 cw(c3362.07,3605.86) 3346.46,3621.46 cw(c3355,3612.93) 3355,3625 cw(c3355,3612.93) 3363.54,3621.46 3365,3620 cw(c3356.54,3611.54) 3368.5,3611.54 U4.36@3368.5,3574.88 ; U4.20@3653.94,3427.24 3681.28,3427.24 ccw(c3681.28,3453.72) 3700,3435 C10.2@3723.88,3458.88 ; U4.21@3653.94,3446.93 3685.37,3446.93 ccw(c3685.37,3514.95) C10.2@3723.88,3458.88 ; U4.24@3653.94,3505.98 3690.3,3505.98 ccw(c3690.3,3519.7) 3700,3510 ccw(c3687.93,3522.07) 3705,3522.07 cw(c3734.01,3522.07) 3713.5,3542.58 C5.2@3733.46,3562.55 ; C10.2@3733.46,3466.85 ccw(c3733.46,3462.95) 3730.71,3465.71 C10.2@3723.88,3458.88
  Top Layer w15: R41.2@2255,3685 2181.42,3685 ccw(c2181.42,3585) 2110.71,3655.71 ccw(c2148.64,3617.78) 2095,3617.78 2095,3510.98 ccw(c2117.29,3510.98) 2101.53,3495.22 ccw(c2123.36,3517.05) 2123.36,3486.18 CN2.1@2171.1,3486.18 2550.94,3486.18 cw(c2550.94,3430.94) 2590,3470 cw(c2547.61,3427.61) 2607.56,3427.61 R19.2@2607.56,3318.39 2654.75,3318.39 cw(c2654.75,3289.75) 2675,3310 cw(c2650.86,3285.86) 2685,3285.86 v1(2685,3205) 2685,3194.14 cw(c2650.86,3194.14) 2675,3170 cw(c2652.28,3192.72) 2652.28,3160.59 R4.2@2607.56,3160.59 ; v1(3225,3205) C6.2@3225,3251.8 ; v1(3280,3560) C11.1@3315,3560 ; R15.2@3665,3065 R16.2@3715,3065 3715,3054.14 ccw(c3749.14,3054.14) 3725,3030 ccw(c3749.14,3054.14) 3749.14,3020 v1(3791.54,3020) 3830.86,3020 ccw(c3830.86,3054.14) 3855,3030 ccw(c3830.86,3054.14) 3865,3054.14 R17.2@3865,3065 R18.2@3915,3065 ; C10.2@3733.46,3466.85 3755.32,3488.71 ccw(c3744.03,3500) 3760,3500 v1(3760,3539.44) 3760,3547.93 ccw(c3742.93,3547.93) 3755,3560 ccw(c3748.84,3553.84) 3748.84,3562.55 C5.2@3733.46,3562.55
  Sign w15: v1(2685,3205) v1(3225,3205) 3268.58,3205 ccw(c3268.58,3305) 3339.29,3234.29 3427.32,3322.32 cw(c3470,3279.64) 3470,3340 cw(c3470,3291.72) 3504.14,3325.86 3530,3300 ; v1(3280,3560) 3710.36,3560 cw(c3710.36,3489.8) v1(3760,3539.44) 3760,3451.42 cw(c3660,3451.42) 3730.71,3380.71 3712.5,3362.5 ; v1(3791.54,3020) 3791.54,3242.04 ccw(c3691.54,3242.04) 3762.25,3312.75 3712.5,3362.5 ; v3(3825,2335) 3615,2335 cw(c3615,2435) 3515,2435 3515,3263.79 cw(c3566.21,3263.79) 3530,3300 ; 3530,3300 cw(c3566.21,3263.79) 3566.21,3315 3623.58,3315 ccw(c3623.58,3415) 3694.29,3344.29 3712.5,3362.5
  Bottom Layer w10: v3(3825,2335) 4108.58,2335 ccw(c4108.58,2435) 4179.29,2364.29 4540.71,2725.71 cw(c4611.42,2655) 4611.42,2755 R43.2@4725,2755 4742.32,2737.68 ccw(c4768.95,2764.31) 4768.95,2726.65 4871.81,2726.65 cw(c4871.87,2686.87) 4900.04,2714.96 ccw(c4932.18,2747.18) 4932.18,2701.67 U17.11@5053.68,2701.67 5131.67,2701.67 ccw(c5131.67,2720) C69.2@5150,2720
  Bottom Layer w15: v1@3759.27,3541.19 cw(c3757.52,3539.44) v1(3760,3539.44)
24to12_1: C45.2 C46.2 C47.2 L1.2 R12.2 R26.2 U1.1 U1.2 | length 1311.8
  Top Layer w10: R12.2@5351.98,2510.83 v1(5351.98,2535.43) R26.2@5351.98,2560.04
  Sign w10: v1(5155,3725) 5215.71,3664.29 cw(c5145,3593.58) 5245,3593.58 5245,2683.83 ccw(c5345,2683.83) 5274.29,2613.12 v1(5351.98,2535.43)
24to12_2: C54.2 C55.2 C56.2 L2.2 R22.2 R29.2 U3.1 U3.2 | length 1315.8
  Top Layer w10: R22.2@4741.74,2510.83 v1(4741.74,2535.43) R29.2@4741.74,2560.04
  Sign w10: v1(4535,3725) 4595.71,3664.29 cw(c4525,3593.58) 4625,3593.58 4625,2693.6 ccw(c4725,2693.6) 4654.29,2622.89 v1(4741.74,2535.43)
2812LED: LED1.4 U4.25 | length 2055.8
  Top Layer w10: LED1.4@2640.83,2442.09 ccw(c2645.86,2447.12) v1(2645.86,2440) ; v1(3540.89,3699.11) 3555.75,3684.25 cw(c3485.04,3613.54) 3585.04,3613.54 U4.25@3585.04,3574.88
  Top Layer w15: v1(2645.86,2440) 2599.29,2486.57 cw(c2670,2557.28) 2570,2557.28 2570,2928.58 cw(c2670,2928.58) 2599.29,2999.29 2600,3000 cw(c2660.36,2939.64) 2660.36,3025 2993.58,3025 ccw(c2993.58,3125) 3064.29,3054.29 v1(3175,3165)
  Bottom Layer w15: v1(3175,3165) 3175,3291.81 cw(c3275,3291.81) 3204.29,3362.52 v1(3540.89,3699.11)
*CS1: H1.7 U4.18 | length 599
  Top Layer w10: U4.18@3653.94,3387.87 3845.7,3387.87 cw(c3845.7,3287.87) 3916.42,3358.58 4095,3180 cw(c4051.94,3136.94) 4112.83,3136.94 4112.83,3125.79 H1.7@4095.63,3125.79
*CS2: U4.41 U17.7 | length 3797.2
  Top Layer w10: v1(3215,3450) ccw(c3237.76,3450) 3237.76,3427.24 U4.41@3299.61,3427.24
  Bottom Layer w10: v1(3215,3450) 3215,3810 cw(c3315,3810) 3315,3910 5015,3910 cw(c5015,3810) 5115,3810 5115,2802.07 cw(c5090.3,2802.07) 5090.3,2777.37 5079.52,2777.37 5014.05,2777.37 cw(c5014.05,2877.37) 4943.34,2806.66 4915,2835 ccw(c4874.75,2794.75) 4874.75,2851.67 U17.7@4835.64,2851.67
*RS2: U4.42 U17.10 | length 3730.8
  Top Layer w10: v1(3190,3425) ccw(c3207.44,3425) 3207.44,3407.56 U4.42@3299.61,3407.56
  Bottom Layer w10: v1(3190,3425) 3190,3830 cw(c3290,3830) 3290,3930 5035,3930 cw(c5035,3830) 5135,3830 5135,3738.7 cw(c5125,3738.75) 5134.11,3734.62 ccw(c5155,3725) 5134.1,3715.39 cw(c5125,3711.25) 5135,3711.3 5135,2784.14 cw(c5100.86,2784.14) 5125,2760 cw(c5104.89,2780.11) 5104.89,2751.67 ; U17.10@5053.68,2751.67 5104.85,2751.67
+5: C1.1 C2.1 C7.1 C14.2 C18.1 C20.2 C21.2 C22.2 C26.2 C65.2 CN1.1 H1.2 L3.2 LED1.1 LED2.1 LED3.1 LED4.1 LED5.1 LED6.1 LED7.1 LED8.1 LED9.1 LED10.1 R37.2 U2.3 U5.3 U8.3 U14.1 U15.16 | length 7731.6
  Top Layer w15: C21.2@2104.96,2277.4 C20.2@2301.81,2277.4 C14.2@2498.66,2277.4 2618.5,2277.4 2640.83,2255.08 LED1.1@2640.83,2245.24 2640.83,2235.39 2653.01,2223.21 2662.85,2223.21 2717.22,2168.84 2746.75,2168.84 LED6.1@2758.94,2156.65 ; CN1.1@2172.2,3144.53 2172.55,3144.18 v1(2275.73,3144.18) v1@2274.01,3142.46 ; v1(2660,3425) cw(c2663.62,3421.38) 2663.62,3426.5 C26.2@2690,3426.5 2729.48,3426.5 ccw(c2729.48,3455.52) 2750,3435 ccw(c2725.82,3459.18) 2760.01,3459.18 U15.16@2760.01,3497.7 2760.01,3550.13 ccw(c2703.63,3550.13) C22.2@2743.5,3590 ; LED6.1@2758.94,2146.81 LED6.1@2758.94,2156.65 ; LED2.1@2857.37,2245.24 LED2.1@2857.37,2235.39 ; LED7.1@2975.47,2146.81 LED7.1@2975.47,2156.65 ; LED3.1@3073.9,2245.24 LED3.1@3073.9,2235.39 ; LED8.1@3192,2146.81 LED8.1@3192,2156.65 ; LED4.1@3290.43,2245.24 LED4.1@3290.43,2235.39 ; LED9.1@3408.54,2146.81 LED9.1@3408.54,2156.65 ; LED5.1@3506.98,2245.24 LED5.1@3506.98,2235.39 ; LED10.1@3625.08,2156.65 3612.89,2168.84 3583.38,2168.84 3529.01,2223.21 3519.16,2223.21 LED5.1@3506.98,2235.39 ; 3875.95,2270.95 ccw(c3920.34,2226.61) 3861.91,2249.47 ccw(c3920.34,2226.61) 3857.6,2226.61 U14.1@3857.6,2223.82 3857.6,2213.97 3827.92,2184.29 cw(c3757.21,2255) 3757.21,2155 3633.27,2155 LED10.1@3625.08,2146.81 3625.08,2136.97 3737.5,2024.55 3737.5,2007.5 C18.1@3755,1990 3770,1975 C65.2@3895,1975 ; 3875.98,2270.98 cw(c3909.88,2237.01) 3909.88,2285 3944.39,2285 ccw(c3944.39,2310.61) 3962.5,2292.5 ccw(c3944.39,2310.61) 3970,2310.61 3970,2339.23 cw(c4020.14,2339.23) 3984.69,2374.69 cw(c4020.14,2339.23) 4020.14,2389.37 R37.2@4026.8,2389.37 ccw(c3982.86,2433.31) 4045,2433.31 4045,2516.53 cw(c4145,2516.53) 4074.29,2587.24 H1.2@4112.83,2625.79 ; LED6.1@2758.94,2156.65 2825.49,2223.21 2845.19,2223.21 LED2.1@2857.37,2235.39 ; LED2.1@2857.37,2235.39 2869.56,2223.21 2908.92,2223.21 LED7.1@2975.47,2156.65 ; LED7.1@2975.47,2156.65 3042.03,2223.21 3061.71,2223.21 LED3.1@3073.9,2235.39 ; LED3.1@3073.9,2235.39 3086.08,2223.21 3095.93,2223.21 3150.3,2168.84 3179.81,2168.84 LED8.1@3192,2156.65 ; LED8.1@3192,2156.65 3258.55,2223.21 3278.25,2223.21 LED4.1@3290.43,2235.39 ; LED4.1@3290.43,2235.39 3302.62,2223.21 3312.46,2223.21 3366.83,2168.84 3396.36,2168.84 LED9.1@3408.54,2156.65 ; LED9.1@3408.54,2156.65 3475.1,2223.21 3494.79,2223.21 LED5.1@3506.98,2235.39
  Sign w15: v1(2560,2310) 2560,2818.49 ccw(c2460,2818.49) 2530.71,2889.2 v1(2275.73,3144.18) 2264.29,3155.62 cw(c2335,3226.33) 2235,3226.33 2235,3351.72 cw(c2303.28,3351.72) 2255,3400 cw(c2315.36,3339.64) 2315.36,3425 v1(2660,3425) ; 3798.04,3461.91 ccw(c3817.54,3442.46) 3790,3442.46 v1(3790,3415) 4005.71,3199.29 cw(c3935,3128.58) 4035,3128.58 4035,2745.04 ccw(c4135,2745.04) 4064.29,2674.33 H1.2@4112.83,2625.79 ; 3798.09,3461.96 cw(c3817.54,3442.46) 3817.54,3470 v1(3935,3470)
  Bottom Layer w15: C7.1@3655,3322.68 C7.1@3655,3325 U8.3@3655,3406.7 3655,3440.29 3655,3440.35 cw(c3678.48,3440.35) 3661.88,3456.95 cw(c3681.31,3437.51) 3681.31,3465 3755.86,3465 cw(c3755.86,3430.86) 3780,3455 cw(c3755.86,3430.86) 3790,3430.86 v1(3790,3415) v1@3788.28,3416.72 ; v1(3935,3470) 4276.36,3470 ; C2.1@4275,3325 U5.3@4275,3405.85 4276.36,3407.21 4276.36,3470 ; C1.1@4895,3325 4894.88,3325.12 4894.88,3405.18 U2.3@4894.76,3405.3 4894.76,3405.42 4894.88,3405.42 4894.88,3453.21 ccw(c4878.21,3453.21) 4890,3465 ccw(c4877.93,3452.93) 4877.93,3470 4276.36,3470
A2_1: C12.1 C13.1 C16.1 C18.2 C19.2 C23.1 C36.1 C37.1 C38.1 C39.1 C44.2 C45.1 C46.1 C47.1 C49.1 C50.1 C53.2 C54.1 C55.1 C56.1 C59.1 C60.1 C63.1 C64.1 C65.1 C68.1 D2.3 D4.3 P1.- R11.1 R13.2 R21.1 R24.2 R27.2 R28.2 R35.1 R39.1 R44.2 U1.3 U1.4 U1.7 U1.8 U3.3 U3.4 U3.7 U3.8 U6.3 U6.4 U6.7 U6.8 U7.6 U7.12 U7.15 U7.21 U13.6 U13.12 U13.15 U13.21 U14.2 U16.5 U17.3 U17.13 | length 1523.9
  Top Layer w8: R28.2@4496.69,2609.25 4496.69,2611.75 4475,2633.44 4475,2693.33 4496.69,2715.02 R21.1@4496.69,2717.52 ; U7.21@4644.33,2855.32 cw(c4620.43,2831.42) 4654.23,2831.42 U7.6@4654.23,2786.5 ; R24.2@5106.93,2610.26 5106.93,2612.76 5085,2634.69 5085,2694.1 5106.93,2716.03 R11.1@5106.93,2718.53
  Top Layer w10: U14.2@3895,2223.82 3901.81,2230.63 3901.81,2259.14 3907.67,2265 3965,2265 3989.37,2289.37 C68.1@4026.8,2289.37 ; R28.2@4496.69,2609.25 C53.2@4545.91,2609.25 4550.91,2604.25 4550.91,2592.92 4583.79,2560.04 R27.2@4586.29,2560.04 ; U7.15@4654.17,2924.22 U7.21@4654.17,2865.16 ; U7.21@4665,2855 4664.68,2855.32 U7.21@4644.33,2855.32 U7.21@4654.17,2865.16 ; C59.1@4746.5,3000 4745.86,2999.36 4745.86,2975.86 4713.8,2943.8 4713.8,2924.81 4712.78,2923.79 4712.78,2904.08 4673.85,2865.16 U7.21@4654.17,2865.16 ; R24.2@5106.93,2610.26 5153.64,2610.26 5188.01,2575.89 5188.01,2565.04 5193.01,2560.04 R13.2@5195.51,2560.04 ; U13.15@5264.41,2924.13 5264.41,2865.07 U13.21@5254.57,2855.23 ; U13.6@5264.47,2786.41 5264.47,2845.33 U13.21@5254.57,2855.23 ; U13.12@5323.01,2923.7 5323.01,2904 5274.25,2855.23 U13.21@5254.57,2855.23 ; U13.12@5323.53,2924.21 5324.04,2924.73 5324.04,2939.04 5356.5,2971.5 C49.1@5356.5,3000
  Top Layer w12: U16.5@4235.55,2228.19 4298.19,2228.19 C64.1@4300,2230
  Top Layer w15: R44.2@3751.22,2449.68 R35.1@3808.02,2449.68 3838.09,2419.62 cw(c3833.47,2415) v1(3840,2415)
  other v1: 4790,1920 4820,1920 4850,1920 4880,1920 4910,1920 4940,1920 4970,1920 5000,1920 5030,1920 5060,1920 5090,1920 5120,1920 5150,1920 5180,1920 5210,1920 5240,1920 5270,1920 4850,1950 4880,1950 4910,1950 4940,1950 4970,1950 5000,1950 5030,1950 5060,1950 5090,1950 5120,1950 5150,1950 5180,1950 5210,1950 4880,1980 4910,1980 4940,1980 4970,1980 5000,1980 5030,1980 5060,1980 5090,1980 5120,1980 5150,1980 5180,1980 4880,2010 4910,2010 4940,2010 4970,2010 5000,2010 5030,2010 5060,2010 5090,2010 5120,2010 5150,2010 5180,2010 4880,2040 4910,2040 4940,2040 4970,2040 5000,2040 5030,2040 5060,2040 5090,2040 5120,2040 5150,2040 5180,2040 3790,2070 3820,2070 3850,2070 3880,2070 3910,2070 3940,2070 4850,2070 4880,2070 4910,2070 4940,2070 4970,2070 5000,2070 5030,2070 5060,2070 5090,2070 5120,2070 5150,2070 5180,2070 5210,2070 4790,2100 4820,2100 4850,2100 4880,2100 4910,2100 4940,2100 4970,2100 5000,2100 5030,2100 5060,2100 5090,2100 5120,2100 5150,2100 5180,2100 5210,2100 5240,2100 5270,2100 3700,2120 4790,2130 4820,2130 4850,2130 4880,2130 4910,2130 4940,2130 4970,2130 5000,2130 5030,2130 5060,2130 5090,2130 5120,2130 5150,2130 5180,2130 5210,2130 5240,2130 5270,2130 5300,2130 5270,2160 5300,2160 5330,2160 5300,2190 5330,2190 5360,2190 4230,2205 4260,2205 4290,2205 3700,2210 5330,2220 5360,2220 5390,2220 3700,2240 3790,2240 3820,2240 5360,2250 5390,2250 5420,2250 3700,2270 3730,2270 3760,2270 3790,2270 3820,2270 5390,2280 5420,2280 5450,2280 5420,2310 5450,2310 5480,2310 5450,2340 5480,2340 5510,2340 5480,2370 5510,2370 5540,2370 5510,2400 5540,2400 5570,2400 5540,2430 5570,2430 4180,2460 4210,2460 5570,2460 4590,2470 4620,2470 4650,2470 4680,2470 4180,2490 4210,2490 5570,2490 4180,2520 4210,2520 5570,2520 4180,2550 4210,2550 5570,2550 4180,2580 4210,2580 5570,2580 4180,2610 4210,2610 5570,2610 4180,2640 4210,2640 5570,2640 4940,2665 4180,2670 4210,2670 5570,2670 4180,2700 4210,2700 5570,2700 5570,2730 4180,2760 4210,2760 5570,2760 4940,2770 4180,2790 4210,2790 5570,2790 5570,2820 4180,2850 4210,2850 5570,2850 4180,2880 4210,2880 5570,2880 4180,2910 4210,2910 5570,2910 4180,2940 4210,2940 4940,2940 5570,2940 4180,2970 4210,2970 4940,2970 5570,2970 4180,3000 4210,3000 4940,3000 5570,3000 4180,3030 4210,3030 4940,3030 5570,3030 5570,3060 4915,3065 5570,3090 4915,3095 5570,3120 4915,3125 5570,3150 4915,3155 5570,3180 5570,3210 5570,3240 5570,3270 5570,3300 4450,3325 5570,3330 4450,3355 5570,3360 4450,3385 5570,3390 4450,3415 5570,3420 5570,3450 5570,3480 5570,3510 4140,3525 4170,3525 4845,3525 4875,3525 4905,3525 4935,3525 5570,3540 4110,3555 4140,3555 4170,3555 4845,3555 4875,3555 4905,3555 4935,3555 5570,3570 4080,3585 4110,3585 4140,3585 4170,3585 5570,3600 4050,3615 4080,3615 4110,3615 4140,3615 4170,3615 5570,3630 5570,3660 5570,3690 4020,3705 4050,3705 4080,3705 4110,3705 4140,3705 4170,3705 4450,3705 4020,3735 4050,3735 4080,3735 4110,3735 4140,3735 4170,3735 4450,3735 4625,3735 4655,3735 4685,3735 4715,3735 4745,3735 4775,3735 4805,3735 4835,3735 4020,3765 4050,3765 4080,3765 4110,3765 4140,3765 4170,3765 4625,3765 4655,3765 4685,3765 4715,3765 4745,3765 4775,3765 4805,3765 4835,3765 4020,3795 4050,3795 4080,3795 4110,3795 4140,3795 4170,3795 4625,3795 4655,3795 4685,3795 4715,3795 4745,3795 4775,3795 4805,3795 4835,3795 3615,3990 3645,3990 3675,3990 3705,3990 3735,3990 3765,3990 3795,3990 3825,3990 3855,3990 3885,3990 3915,3990 3945,3990 4245,3990 4275,3990 4305,3990 4335,3990 4365,3990 4395,3990 4425,3990 4455,3990 4485,3990 4515,3990 4545,3990 4575,3990 4875,3990 4905,3990 4935,3990 4965,3990 4995,3990 5025,3990 5055,3990 5085,3990 5115,3990 5145,3990 5175,3990 5205,3990 3570,4015 3600,4015 3630,4015 3660,4015 3690,4015 3720,4015 3750,4015 3780,4015 3810,4015 3840,4015 3870,4015 3900,4015 3930,4015 3960,4015 3990,4015 4020,4015 4050,4015 4080,4015 4110,4015 4140,4015 4170,4015 4200,4015 4230,4015 4260,4015 4290,4015 4320,4015 4350,4015 4380,4015 4410,4015 4440,4015 4470,4015 4500,4015 4530,4015 4560,4015 4590,4015 4620,4015 4650,4015 4680,4015 4710,4015 4740,4015 4770,4015 4800,4015 4830,4015 4860,4015 4890,4015 4920,4015 4950,4015 4980,4015 5010,4015 5040,4015 5070,4015 5100,4015 5130,4015 5160,4015 5190,4015 5220,4015 5250,4015
  other v2: 4595,2825 4655,2825 4675,2825 4695,2825 5205,2825 5225,2825 5265,2825 5285,2825 5305,2825 4655,2845 4675,2845 4695,2845 5205,2845 5225,2845 5265,2845 5285,2845 5305,2845 4675,2865 4695,2865 5205,2865 5225,2865 5265,2865 5285,2865 5305,2865 5205,2885 5225,2885 5265,2885 5285,2885 5305,2885
ADC1: R34.1 R35.2 U4.8 | length 1276.4
  Top Layer w8: U4.8@3506.3,3220.55 3506.3,3266.07 cw(c3518.93,3266.07) 3510,3275 cw(c3522.07,3262.93) 3522.07,3280 v1(3560,3280)
  Top Layer w15: R35.2@3856.22,2449.68 v1(3884.62,2449.68) R34.1@3913.02,2449.68
  Sign w15: v1(3560,3280) 3560,2546.99 3560,2546.94 ccw(c3655.99,2546.94) 3588.11,2479.06 ; 3588.15,2479.03 ccw(c3659.04,2549.99) 3659.04,2449.68 v1(3884.62,2449.68)
DC: H1.6 U4.17 | length 653.1
  Top Layer w10: U4.17@3653.94,3368.19 3840.39,3368.19 cw(c3840.39,3268.19) 3911.1,3338.9 4035.71,3214.29 cw(c3965,3143.58) 4065,3143.58 4065,3115.04 ccw(c4165,3115.04) 4094.29,3044.33 H1.6@4112.83,3025.79
FDCAN1_N: R2.1 U1.6 U2.6 | length 187.5
  Top Layer w15: U1.6@4890.4,3795.51 cw(c4860.98,3766.09) 4902.58,3766.09 4902.58,3736.83 ccw(c4908.24,3736.83) v1@4904.24,3732.83 ; v1@4904.24,3732.82 cw(c4900.24,3728.82) 4905.9,3728.82 v1(4905.9,3728.73)
  Bottom Layer w15: U2.6@4894.76,3623.6 4894.76,3643 cw(c4918.04,3643) 4901.58,3659.46 ccw(c4885.12,3675.92) 4908.4,3675.92 4908.4,3684.47 ccw(c4892.87,3684.47) 4903.85,3695.45 4901.07,3698.23 ccw(c4896.8,3693.96) R2.1@4896.8,3700 ccw(c4874.83,3721.97) 4905.9,3721.97 v1(4905.9,3728.73)